# EAGLE board blinkm_mk2c (EAGLE 6.5.0)
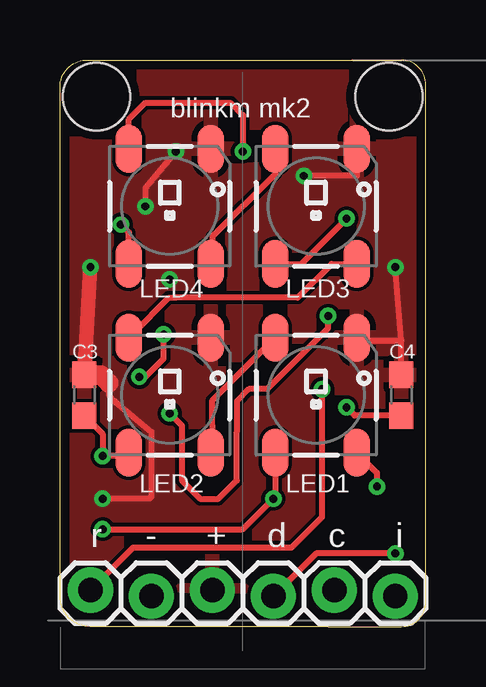
[diagram p0: board, top side]
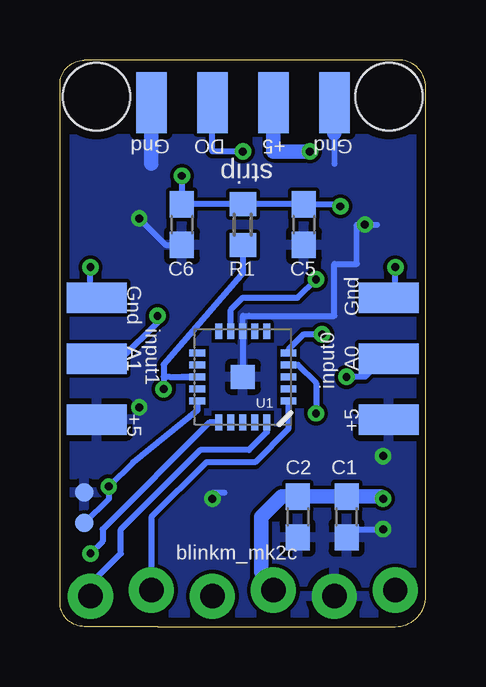
[diagram p1: board, bottom side, seen from below]

Size 15.24 x 23.63 mm. Coordinates in mm from the lower left corner, seen from the top.
Outline: 11.18,0 1.27,0 arc-90 0,1.27 0,22.61 arc-90 1.27,23.62 14.22,23.62 arc-90 15.24,22.61 15.24,11.18 15.24,8.89 15.24,1.02 arc-90 14.22,0 11.18,0
Copper layers (1*16): Top 0.0356mm / dielectric 1.5011mm / Bottom 0.0356mm
Design rules "LaenPCBOrder-tod": minimum track width 10mil, minimum drill 13mil, track to track 6mil, track to pad 8mil, pad to pad 8mil, via to via 8mil, smd to smd 6mil, copper to edge 15mil, drill to drill 8mil, minimum pad ring 7mil, minimum via ring 7mil, stop-mask expansion 4mil, vias tented up to drill 25mil, thermal gap 10mil
Holes 2.8 mm at 13.72,22.1 1.52,22.1

## Footprints (pad centres in the part's own frame; a part is rotated, then mirrored left to right if it is on the bottom)
C0603 = smd 1.1 x 1: 1 -0.85,0; 2 0.85,0
1X4-SMT = smd 1.27 x 2.54: 1 -3.81,0; 2 -1.27,0; 3 1.27,0; 4 3.81,0
1X03-SMD-MINIMAL = smd 1.27 x 2.5: 1 -2.54,-0.01; 2 0,-0.01; 3 2.54,-0.01
1X06_LOCK = drill 1.016 pad 1.88: 1 0,0; 2 2.54,-0.254; 3 5.08,0; 4 7.62,-0.254; 5 10.16,0; 6 12.7,-0.254
WS2812B = smd 2 x 1.1: 1 -2.4,1.7; 2 -2.4,-1.7; 3 2.4,-1.7; 4 2.4,1.7
R0603 = smd 1 x 1.1: 1 -0.85,0; 2 0.85,0
PAD.03X.03 = smd 0.762 x 0.762: P$1 0,0
QFN20 = smd 1 x 1: 0 0,0 | smd 0.65 x 0.3: 1 -1.9,1; 2 -1.9,0.5; 3 -1.9,0; 4 -1.9,-0.5; 5 -1.9,-1; 11 1.9,-1; 12 1.9,-0.5; 13 1.9,0; 14 1.9,0.5; 15 1.9,1 | smd 0.3 x 0.65: 6 -1,-1.9; 7 -0.5,-1.9; 8 0,-1.9; 9 0.5,-1.9; 10 1,-1.9; 16 1,1.9; 17 0.5,1.9; 18 0,1.9; 19 -0.5,1.9; 20 -1,1.9

## Placement (x,y rotation side)
C1  100nF  [C0603]  3.3,4.57 270 bottom
C2  10uF  [C0603]  5.33,4.57 270 bottom
C3  100nF  [C0603]  1.02,9.65 270 top
C4  100nF  [C0603]  14.22,9.65 270 top
C5  100nF  [C0603]  5.08,16.76 270 bottom
C6  100nF  [C0603]  10.16,16.76 270 bottom
CN1  1X4SMT  [1X4-SMT]  7.62,21.84 0 bottom
JP1  M03SMDM  [1X03-SMD-MINIMAL]  13.72,11.18 90 bottom
JP2  M03SMDM  [1X03-SMD-MINIMAL]  1.52,11.18 270 bottom
JP4  blinkm  [1X06_LOCK]  1.27,1.52 0 top
LED1  WS2812B  [WS2812B]  10.67,9.65 270 top
LED2  WS2812B  [WS2812B]  4.57,9.65 270 top
LED3  WS2812B  [WS2812B]  10.67,17.53 270 top
LED4  WS2812B  [WS2812B]  4.57,17.53 270 top
R1  10k  [R0603]  7.62,16.76 90 bottom
TP1  TEST-POINT3  [PAD.03X.03]  14.22,4.32 0 bottom
TP2  TEST-POINT3  [PAD.03X.03]  14.22,5.59 0 bottom
U1  ATTINY44QFN  [QFN20]  7.62,10.41 180 bottom

## Library data of the parts
C1-C6 R1 = rcl
CN1 = adafruit
JP1 JP2 = todstuff
JP4 = SparkFun-Connectors
LED1-LED4 = WS2812
TP1 TP2 = SparkFun-Passives
U1 = SparkFun-DigitalIC

## Nets
+5V: C1.1 C2.1 C3.1 C4.1 C5.1 C6.1 CN1.3 JP1.3 JP2.1 JP4.3 LED1.1 LED2.1 LED3.1 LED4.1 R1.2 U1.9
A0: JP2.2 U1.5
A1: JP1.2 U1.4
DI: LED1.4 TP1.P$1 U1.15
DO: CN1.2 LED4.2
GND: C1.2 C2.2 C3.2 C4.2 C5.2 C6.2 CN1.1 CN1.4 JP1.1 JP2.3 JP4.2 LED1.3 LED2.3 LED3.3 LED4.3 TP2.P$1 U1.0 U1.8
MISO: JP4.6 U1.20
N$1: LED1.2 LED2.4
N$2: LED2.2 LED3.4
N$3: LED3.2 LED4.4
N$6: U1.3
N$7: U1.2
N$12: U1.11
N$13: U1.12
N$14: U1.14
RESET: JP4.1 R1.1 U1.13
SCL: JP4.5 U1.1
SDA: JP4.4 U1.16

## Tracks (layer width: path | path; a pad name or v marks a point on that pad's centre or on a via)
+5V  (via drill 0.33 pad 0.69)
  Top 0.254: LED1.1 12.37,11.94 14.22,11.94 | 14.22,11.94 v13.97,14.99 | 6.35,20 6.35,19.3 | v10.16,18.8 12.37,18.8 LED3.1 | C4.1 14.22,11.94 | v4.83,19.81 3.56,18.29 v3.56,17.53 | 2.03,10.16 2.03,9.65 2.29,9.4 3.81,8.13 3.81,5.42 3.72,5.33 v1.78,5.33
  Top 0.61: LED4.1 6.35,20 | C3.1 v1.27,14.99
  Top 0.813: C3.1 1.69,10.5 2.03,10.16
  Bottom 0.254: U1.9 8.12,13.22 7.62,13.72 5.33,13.72 v4.57,14.48 | v10.16,18.8 C6.1 R1.2 C5.1 3.64,17.61 v3.56,17.53 | CN1.3 6.35,21.08 | JP2.1 1.27,13.98 v1.27,14.99 | JP1.3 13.97,13.98 v13.97,14.99
  Bottom 0.61: JP4.3 6.86,2.29 6.86,4.57 6.01,5.42 C2.1 C1.1 1.87,5.42 v1.78,5.33 | 6.35,21.08 6.35,19.81 v4.83,19.81
  pour Top: -2.29,23.37 -2.29,1.78 22.1,1.52 22.1,23.11
A0  (via drill 0.33 pad 0.69)
  Top 0.254: v3.3,10.41 3.56,10.41 4.32,11.18 v4.32,12.19
  Bottom 0.254: JP2.2 1.78,11.18 2.54,10.41 v3.3,10.41 | U1.5 5.7,11.43 5.7,11.57 5.08,12.19 v4.32,12.19
A1  (via drill 0.33 pad 0.69)
  Top 0.254: v4.57,8.89 5.08,8.38 5.08,6.1 5.84,5.33 6.6,5.33 7.37,6.1 7.37,8.13 7.37,9.4 7.87,9.91 8.64,9.91 10.92,12.19 11.18,12.45 v11.18,12.95
  Bottom 0.254: JP1.2 12.69,11.18 11.18,12.69 v11.18,12.95 | U1.4 5.33,10.91 4.57,10.16 v4.57,8.89
DI  (via drill 0.33 pad 0.69)
  Top 0.254: LED1.4 13.21,6.41 v13.21,5.84
  Bottom 0.254: U1.15 9.52,9.02 12.19,6.86 v13.21,5.84 13.21,5.33 TP1.P$1
DO  (via drill 0.33 pad 0.69)
  Top 0.254: LED4.2 2.87,21.16 3.56,21.84 4.14,21.84 7.11,21.84 7.62,21.34 v7.62,19.81
  Bottom 0.254: v7.62,19.81 8.89,19.81 CN1.2
GND  (via drill 0.33 pad 0.69)
  Top 0.254: LED2.3 2.57,7.25 2.43,7.11 v1.78,7.11 1.78,8.04 C3.2 | LED4.3 2.87,16.43 v2.54,16.76 | LED3.3 10.05,15.13 v11.94,17.02 | LED1.3 8.97,5.33 v8.89,5.33 7.62,4.06 v1.78,4.06 | C4.2 12.28,8.8 v11.94,9.14
  Bottom 0.254: 7.62,11.68 U1.0 U1.8 7.62,12.95 7.37,12.95 3.81,12.95 3.81,15.13 LED4.3 2.87,16.76 v2.54,16.76 2.03,16.76 | 3.81,20.57 3.81,19.3 | v11.94,17.02 10.83,15.91 C6.2 | v8.89,5.33 8.89,5.59 8.38,5.59 | 2.79,4.06 v1.78,4.06
  Bottom 0.61: CN1.1 11.43,19.3 | CN1.4 3.81,20.57
  pour Bottom: 20.32,20.32 20.32,-1.02 -1.02,-1.02 -1.02,20.32
MISO
  Bottom 0.254: U1.20 6.62,8.11 7.37,7.37 9.4,7.37 12.7,4.06 12.7,3.05 13.97,1.78 JP4.6
N$1
  Top 0.254: LED2.4 6.35,7.33 6.35,8.38 6.35,9.43 LED1.2
N$2
  Top 0.254: LED2.2 3.05,12.23 4.54,13.72 4.83,13.72 9.91,13.72 11.32,15.13 LED3.4
N$3
  Top 0.254: LED3.2 8.97,18.87 6.35,16.26 6.35,15.2 LED4.4
RESET  (via drill 0.33 pad 0.69)
  Top 0.254: v10.92,9.91 10.92,4.57 9.65,3.3 4.32,3.3 3.05,3.3 JP4.1
  Bottom 0.254: 10.16,10.41 10.67,10.41 10.92,10.41 | 10.16,10.41 U1.13 10.16,10.41 | 10.92,10.41 10.92,10.92 7.71,14.64 7.62,14.73 R1.1 | 10.92,10.41 v10.92,9.91
SCL
  Bottom 0.254: U1.1 5.72,8.25 7.11,6.86 9.14,6.86 11.43,4.57 JP4.5
SDA  (via drill 0.33 pad 0.69)
  Top 0.254: v13.97,3.05 10.67,3.05 JP4.4
  Bottom 0.254: U1.16 9.01,8.51 13.46,4.06 13.46,3.56 v13.97,3.05

## Text on the board
tPlace: blinkm mk2 | r | - | + | d | c | i
bPlace: Gnd | +5 | DO | Gnd | strip | Gnd | Gnd | input1 | A1 | A1 | A0 | input0 | +5 | +5 | blinkm_mk2c